# Altium PCB AST_MAINBOARD.PcbDoc
Units mil, origin at the board's own origin, x right, y up, seen from the top; angles counter-clockwise.
Board outline 2100 x 1200 mil, 2 copper layers (Top Layer, Bottom Layer), stack 61.855 mil thick; 11 components, 27 nets, 75 pads, 55 vias.
Unrouted connection lines stored in the file: 6.
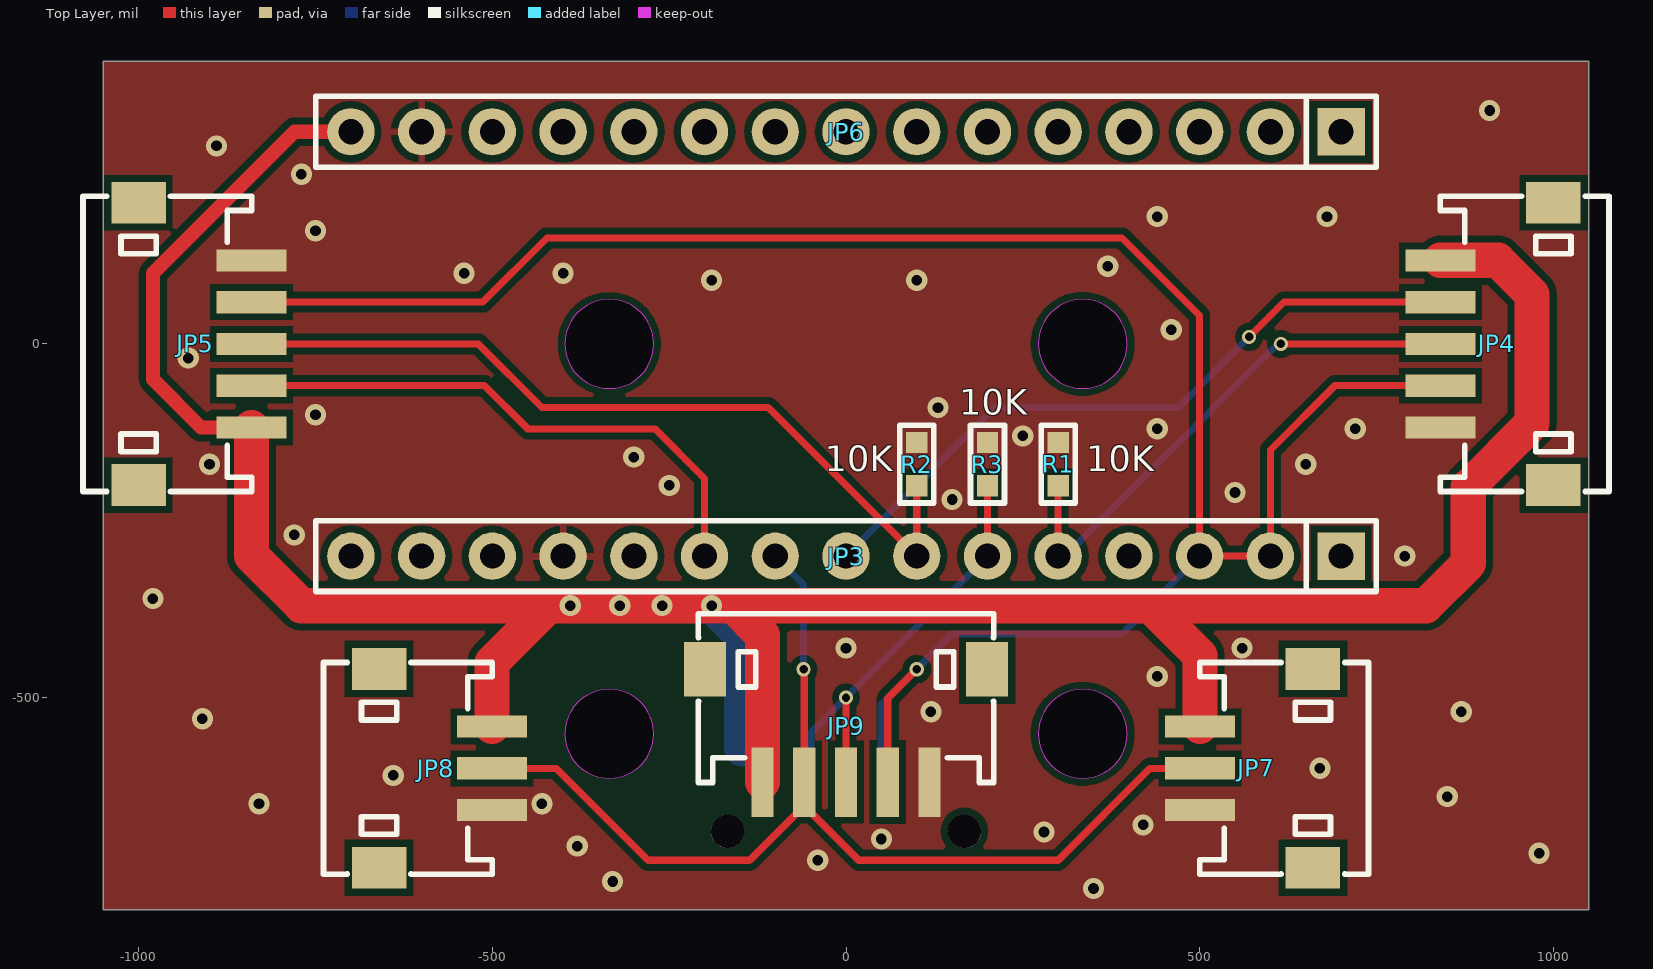
[diagram p0: Top Layer view]
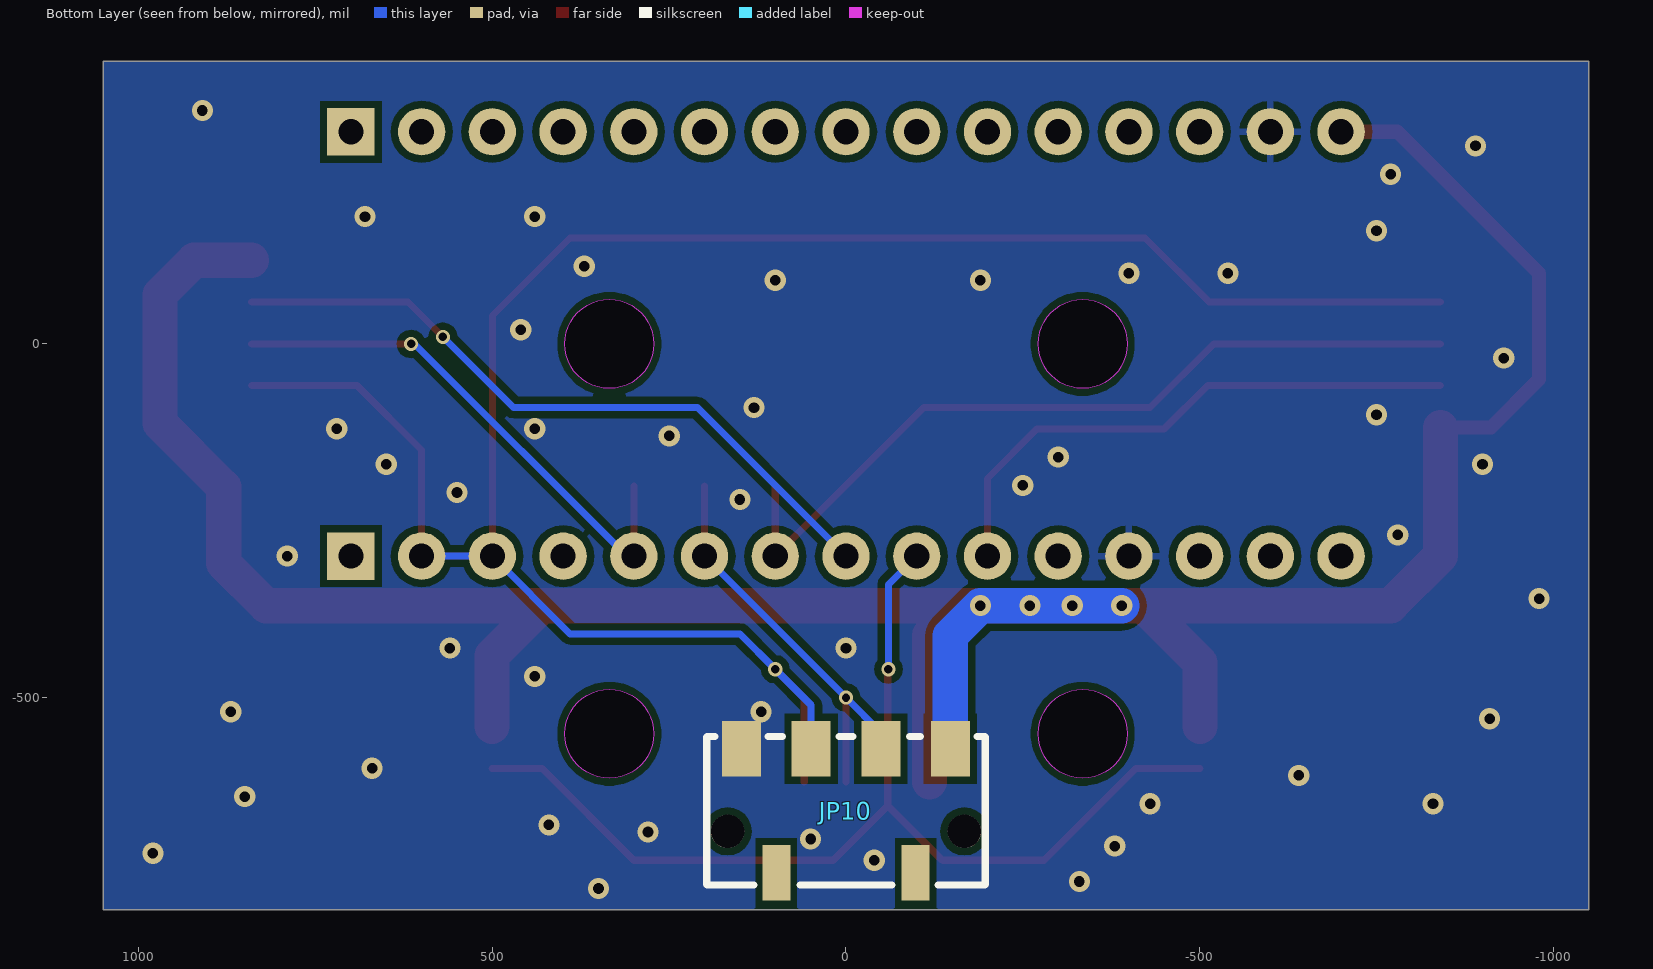
[diagram p1: Bottom Layer view, seen from below]

## Layer stack, top to bottom
Top Solder: solder mask 0.4, Solder Resist, Dk 3.5
Top Layer: signal copper 1.4
Dielectric 1: dielectric 59.0551, FR-4, Dk 4.8
Bottom Layer: signal copper 1.4
Bottom Solder: solder mask 0.4, Solder Resist, Dk 3.5

## Board outline
-1050,-800 -1050,400 1050,400 1050,-800
cut-out: 271.65,-551.18 ccw(c334.65,-551.18) 334.65,-614.17 ccw(c334.65,-551.18) 397.64,-551.18 ccw(c334.65,-551.18) 334.65,-488.19 ccw(c334.65,-551.18)
cut-out: 271.65,0 ccw(c334.65,0) 334.65,-62.99 ccw(c334.65,0) 397.64,0 ccw(c334.65,0) 334.65,62.99 ccw(c334.65,0)
cut-out: -397.64,0 ccw(c-334.65,0) -334.65,-62.99 ccw(c-334.65,0) -271.65,0 ccw(c-334.65,0) -334.65,62.99 ccw(c-334.65,0)
cut-out: -397.64,-551.18 ccw(c-334.65,-551.18) -334.65,-614.17 ccw(c-334.65,-551.18) -271.65,-551.18 ccw(c-334.65,-551.18) -334.65,-488.19 ccw(c-334.65,-551.18)

## Design rules (kind name [scope] priority, off if disabled: settings)
Clearance [All] p1: gap=10 ignorepadtopadclearanceinfootprint=FALSE except(0: Arc-Hole Track-Hole SMDPad-Hole THPad-Hole Via-Hole Fill-Hole Poly-Hole Region-Hole Text-Hole)
PlaneConnect [All] p1: pad.planeconnectstyle=Relief pad.reliefexpansion=20 pad.reliefentries=4 pad.reliefconductorwidth=10 pad.reliefairgap=10 via.planeconnectstyle=Direct via.reliefexpansion=20 via.reliefentries=4 via.reliefconductorwidth=10 via.reliefairgap=10
PolygonConnect [InNet('GND')] p1: thpad.connectstyle=Relief thpad.reliefconductorwidth=10 thpad.reliefentries=4 thpad.polygonreliefangle="90 Angle" thpad.airgapwidth=10 smdpad.connectstyle=Direct smdpad.reliefconductorwidth=10 smdpad.reliefentries=4 smdpad.polygonreliefangle="90 Angle" smdpad.airgapwidth=10 via.connectstyle=Direct via.reliefconductorwidth=10 via.reliefentries=4 via.polygonreliefangle="90 Angle" via.airgapwidth=10
RoutingVias [All] p1: holewidth=12 width=20 viastyle="Through Hole" minholewidth=12 minwidth=20 maxholewidth=28 maxwidth=50
SolderMaskExpansion [All] p1: expansion=4
Width [All] p1: maxlimit=100 minlimit=10 preferedwidth=10
29 further rules are at their usual default settings.

## Components (designator, comment, footprint, x,y, rotation, side; value= is the part's Value field where it differs from the comment)
JP3 "HDR-1X15" HDR2.54-M-LI-15P 0,-300 r180 top
JP4 "HDR-1X5" ZH1.5-WS-5P 1000,0 r90 top
JP5 "HDR-1X5" ZH1.5-WS-5P -1000,0 r270 top
JP6 "HDR-1X15" HDR2.54-M-LI-15P 0,300 r180 top
JP7 "HDR-1X3" ZH1.5-WS-3P 660,-600 r90 top
JP8 "HDR-1X3" ZH1.5-WS-3P -660,-600 r270 top
JP9 "HDR-1X5" ZH1.5-WS-5P 0,-460 r180 top
JP10 "BC-35-4PD350" BC-35-4PD350 0,-660 r90 bottom
R1 "10K" "R 0603_L" 300,-170 r90 top
R2 "10K" "R 0603_L" 100,-170 r90 top
R3 "10K" "R 0603_L" 200,-170 r90 top

## Footprints (in the part's own frame and the unit in brackets; to place one, negate y for a bottom-side part, rotate by r counter-clockwise, add the part's x,y. Pads: shape width x height; smd on the part's side, far side on the other; paste and mask are expansions set on the pad)
BC-35-4PD350 [mm] "弹簧触片-4P"
  rect 2x1 smd: 0(-2.225,-2.5) 0(-2.225,2.5)
  round 1.2 hole 1.2: 0(-0.74,-4.25) 0(-0.74,4.25)
  rect 2x1.4 smd: 1(2.225,3.75) 2(2.225,1.25) 3(2.225,-1.25) 4(2.225,-3.75)
  silkscreen extent -2.67,-5 2.67,5, body extent -2.65,-5 2.65,5, height 5.35
HDR2.54-M-LI-15P [mm] "排母，15脚"
  rect 1.7x1.7 hole 0.9: 1(-17.78,0)
  round 1.7 hole 0.9: 2(-15.24,0) 3(-12.7,0) 4(-10.16,0) 5(-7.62,0) 6(-5.08,0) 7(-2.54,0) 8(0,0) 9(2.54,0) 10(5.08,0) 11(7.62,0) 12(10.16,0) 13(12.7,0) 14(15.24,0) 15(17.78,0)
  silkscreen extent -19.05,-1.27 19.05,1.27, body extent -19.05,-1.27 19.05,1.27, height 8.5
"R 0603_L" [mil] "1/10W贴片电阻"
  rect 30x30 smd: 1(-30.59,0) 2(30.59,0)
  silkscreen extent -55,-24 55,24, body extent -31,-16 32,16, height 16
ZH1.5-WS-3P [mm] "长：7.6mm，宽：6.0mm，高：3.7mm"
  rect 1.5x1.95 smd: 0(-3.568,0) 0(3.568,0)
  rect 0.8x2.5 smd: 1(-1.5,4.05) 2(0,4.05) 3(1.5,4.05)
  silkscreen extent -3.8,-2 3.8,4.06, body extent -3.8,-2 3.8,4.6, height 3.75
ZH1.5-WS-5P [mm] "长：10.6mm，宽：6.0mm，高：3.7mm"
  rect 1.5x1.95 smd: 0(-5.068,0) 0(5.068,0)
  rect 0.8x2.5 smd: 1(-3,4.05) 2(-1.5,4.05) 3(0,4.05) 4(1.5,4.05) 5(3,4.05)
  silkscreen extent -5.3,-2 5.3,4.06, body extent -5.3,-2 5.3,4.6, height 3.75

## Part data
JP3 JP6: library part "Header 15", "15P接插件", BOM名称=15P接, 学习资源=www.ooocke.
JP4 JP5 JP9: library part "Header 5", "5P接插件", BOM名称=5P接, 学习资源=www.ooocke.
JP7 JP8: library part "Header 3", "3P接插件", BOM名称=3P接, 学习资源=www.ooocke.
R1 R2 R3: library part R, "贴片电阻"

## Via types
v1: diameter 30, hole 15, Top Layer to Bottom Layer, 50 vias
v2: diameter 20, hole 12, Top Layer to Bottom Layer, 5 vias

## Nets (pads, with @x,y where several pads share a name; then routed paths per layer and width w, separated by ;. In a path a pad name is that pad's centre, name@x,y a point inside that pad or via, vN(x,y) a via of type N, cw(c..) or ccw(c..) an arc to the next point about the centre after c; other vN are vias at no path point)
3V3: JP6.2
5V: JP6.12
A0: JP6.4
A1: JP6.5
A2: JP6.6
A3: JP6.7
A4: JP6.8
A5: JP6.9
A6: JP6.10
A7: JP6.11
AREF: JP6.3
D2: JP3.11
D3: JP3.10 JP5.4 | length 804.8
  Top Layer w10: JP5.4 -510.94,-59.06 -450,-120 -270,-120 -200,-190 JP3.10
D4: JP3.9 JP7.2 JP8.2 JP9.4 | length 1542.5
  Top Layer w10: JP8.2 -410,-600 -280,-730 -136.14,-730 JP9.4@-59.06,-652.91 ; v2(-60,-460) -59.06,-460.94 JP9.4 JP9.4@-59.06,-652.91 ; JP7.2 430,-600 300,-730 18.03,-730 JP9.4@-59.06,-652.91
  Bottom Layer w10: JP3.9 -60,-340 v2(-60,-460)
D5: JP3.8 JP4.4 | length 989.3
  Top Layer w10: v2(570,10) 619.06,59.06 JP4.4
  Bottom Layer w10: JP3.8 210,-90 470,-90 v2(570,10)
D6: JP3.7 JP5.3 R2.1 | length 1164.2
  Top Layer w10: JP5.3 -520,0 -430,-90 -110,-90 JP3.7 R2.1
D7: JP3.6 JP9.3 JP10.3 R3.1 | length 594.5
  Top Layer w10: JP9.3 v2(0,-500) ; JP3.6 R3.1
  Bottom Layer w10: JP10.3 -49.21,-549.21 v2(0,-500) JP3.6
D8: JP3.5 JP4.3 R1.1 | length 764.2
  Top Layer w10: JP3.5 R1.1 ; v2(615,0) JP4.3
  Bottom Layer w10: JP3.5 310,-300 610,0 v2(615,0)
D9: JP3.4
D10: JP3.2 JP3.3 JP4.2 JP5.2 JP9.2 JP10.2 | length 3168.1
  Top Layer w10: JP5.2 -513.64,59.06 -422.7,150 390,150 500,40 JP3.3 JP3.2 600,-150 690.94,-59.06 JP4.2 ; JP9.2 59.06,-500.94 v2(100,-460)
  Bottom Layer w10: JP10.2 49.21,-510.79 v2(100,-460) 150,-410 390,-410 JP3.3 JP3.2
D12: JP3.1
D13: JP6.1
GND: JP3.12 JP4.1 JP5.1 JP6.14 JP7.1 JP8.3 JP9.1 JP10.1 R1.2 R2.2 R3.2
  other v1: 350,-770 -330,-760 -40,-730 980,-720 -380,-710 50,-700 280,-690 420,-680 -830,-650 -430,-650 850,-640 -640,-610 670,-600 -910,-530 120,-520 870,-520 440,-470 0,-430 560,-430 -980,-360 790,-300 -780,-270 150,-220 550,-210 -250,-200 -900,-170 650,-170 -300,-160 250,-130 440,-120 720,-120 -750,-100 130,-90 -930,-20 460,20 -190,90 100,90 -540,100 -400,100 370,110 -750,160 440,180 680,180 -770,240 -890,280 910,330
RST: JP3.13 JP6.13
RX0: JP3.14
TX1: JP3.15
Vin: JP4.5 JP5.5 JP6.15 JP7.3 JP8.1 JP9.5 JP10.4 | length 4294.4
  Top Layer w20: JP5.5 -911.89,-118.11 -980,-50 -980,100 -780,300 JP6.15
  Top Layer w50: JP5.5 -840.55,-299.45 -770,-370 -420,-370 ; JP8.1 -500.55,-450.55 -420,-370 ; JP9.5 -118.11,-411.89 -160,-370 ; JP7.3 500.55,-440.55 430,-370 ; JP4.5 921.89,118.11 970,70 970,-112.12 880,-202.12 880,-310 820,-370 430,-370 ; -420,-370 -160,-370 ; -160,-370 430,-370
  Bottom Layer w50: v1(-390,-370) v1(-190,-370) -147.64,-412.36 JP10.4
  other v1: -320,-370 -260,-370
pads on no net: JP4.0 JP5.0 JP7.0 JP8.0 JP9.0 JP10.0

## Polygon pours and split planes (outlines as drawn)
GND on Bottom Layer "GND_L02_P001" (solid, remove dead copper, pour order 1): -1050,-800 -1050,400 1050,400 1050,-800
GND on Top Layer "GND_L01_P000" (solid, remove dead copper, pour order 0): -1050,-800 -1050,400 1050,400 1050,-800

## Silkscreen, mask and mechanical layers (free items; w line width, h text height)
Mechanical 1:
  circle w10: c-334.65,0 r62.99
  circle w10: c334.65,0 r62.99
  circle w10: c334.65,-551.18 r62.99
  circle w10: c-334.65,-551.18 r62.99
  lines w10: -1050,-800 -1050,400 1050,400 1050,-800 -1050,-800